# Altium PCB Camera_LED_V1.2_20200630A.PcbDoc
Units mm, origin at the board's own origin, x right, y up, seen from the top; angles counter-clockwise.
Board outline 32.5 x 60.6 mm, 2 copper layers (Top Layer, Bottom Layer); 5 components, 27 nets, 102 pads, 173 vias.
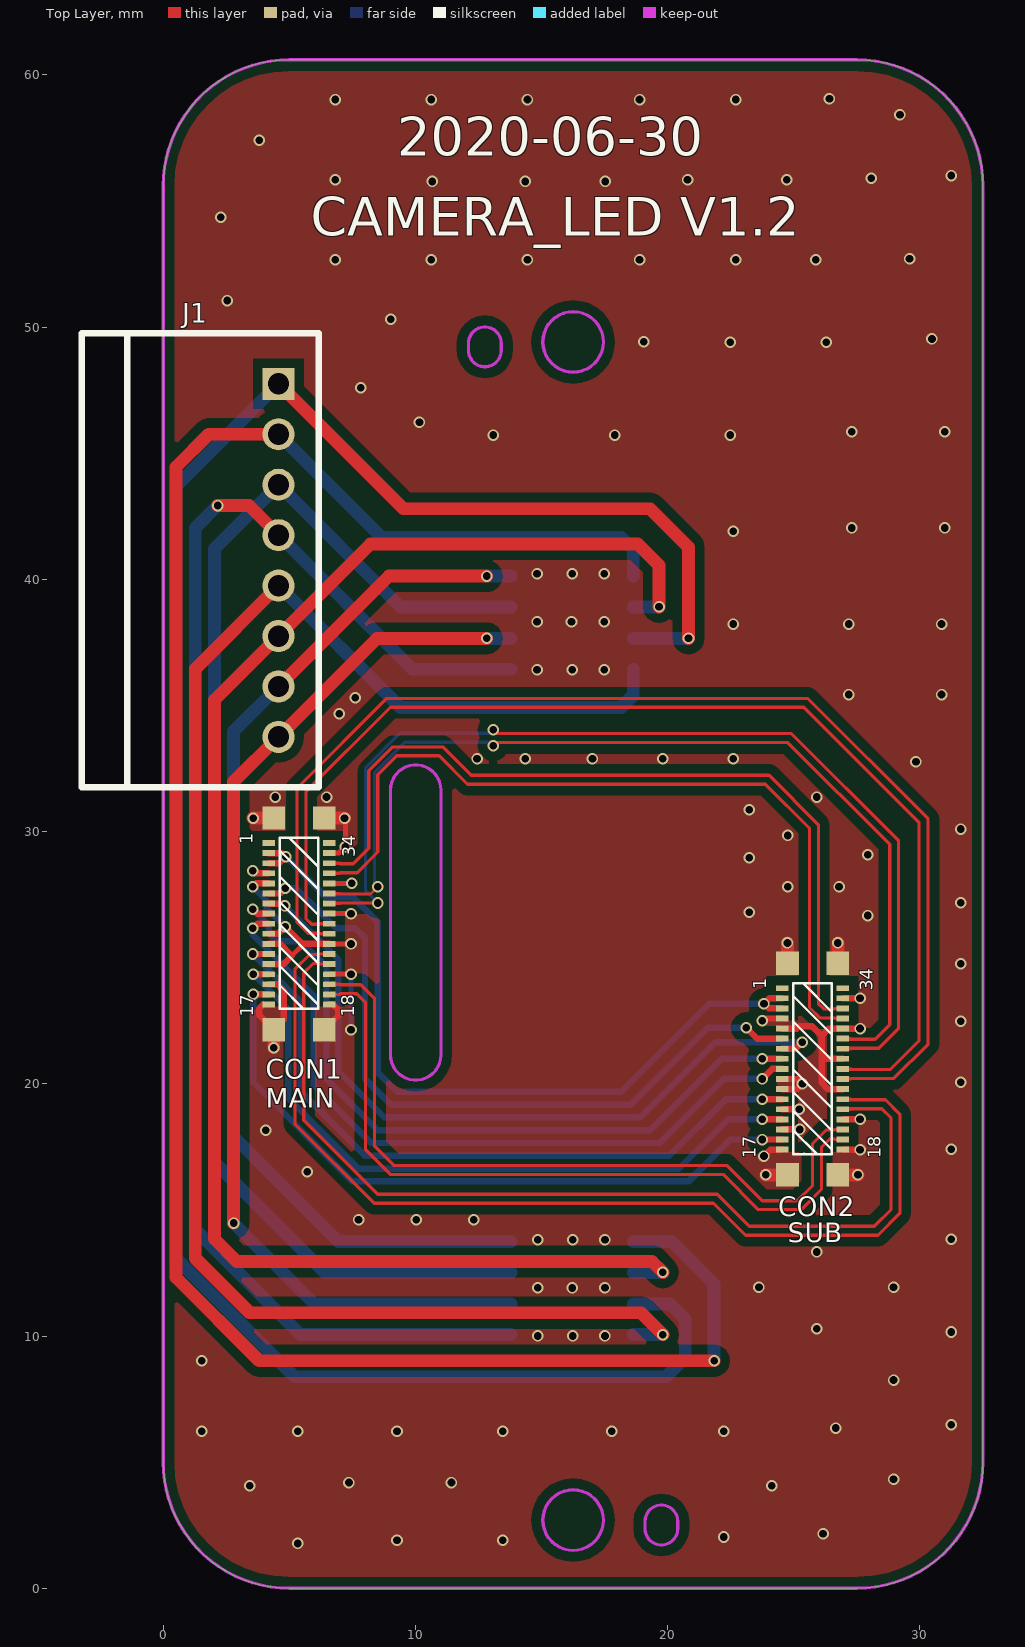
[diagram p0: Top Layer view]
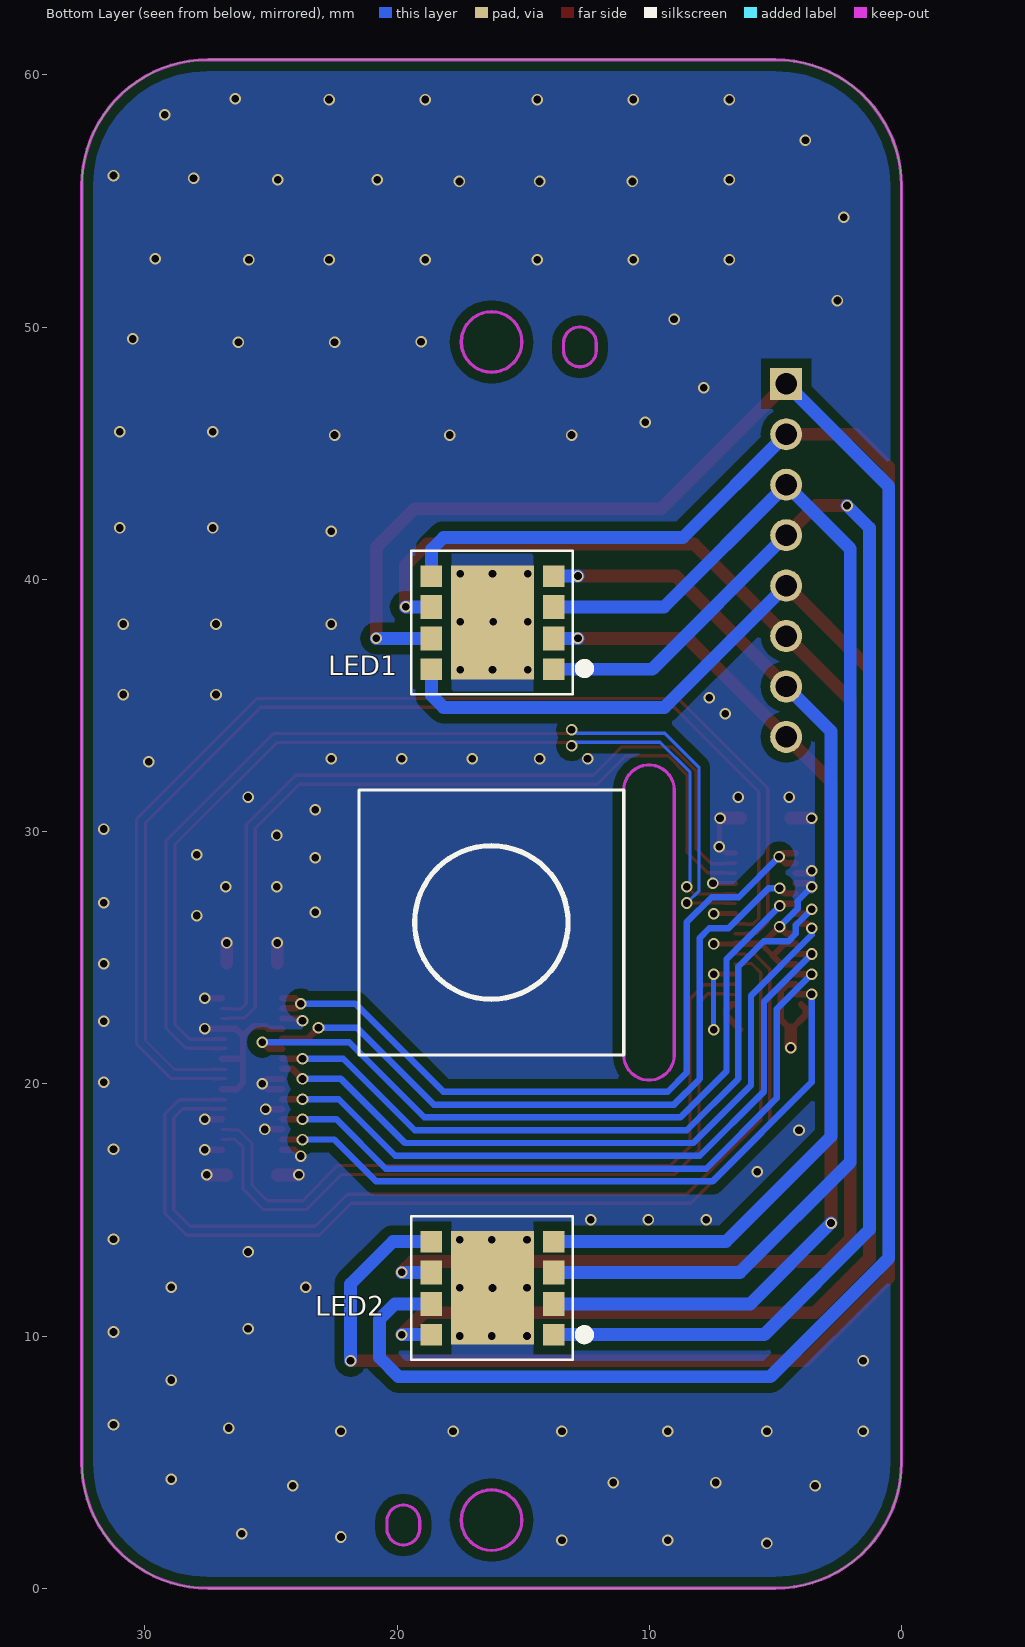
[diagram p1: Bottom Layer view, seen from below]

## Layer stack, top to bottom
Top Layer: signal copper 0.0356
Dielectric: dielectric 0.32, FR-4, Dk 4.8
Bottom Layer: signal copper 0.0356

## Board outline
0.001,5 0.001,55.6 cw(c5.001,55.6) 5.001,60.6 27.501,60.6 cw(c27.501,55.6) 32.501,55.6 32.501,5 cw(c27.501,5) 27.501,0 5.001,0 cw(c5.001,5)

## Design rules (kind name [scope] priority, off if disabled: settings)
Clearance [All] p1: gap=0.127
ComponentClearance [All] p1: gap=0 collisioncheckmode=3 verticalgap=0 showdistances=FALSE
DiffPairsRouting DIFF100 [(InNetClass('DIFF'))] p1: maxlimit=0.229 minlimit=0.229 mostfreqgap=0.229 maxuncoupledlength=12.7
DiffPairsRouting [All] p2: maxlimit=0.229 minlimit=0.229 mostfreqgap=0.229 maxuncoupledlength=12.7
HoleSize [All] p1: absolutevalues=TRUE maxlimit=12.7 minlimit=0.025 maxpercent=80.000 minpercent=20.000
HoleToHoleClearance [All] p1: gap=0 allowstackedmicrovias=TRUE
MinimumSolderMaskSliver [All] p1: minsoldermaskwidth=0
PlaneConnect [All] p1: planeconnectstyle=Direct reliefexpansion=0.508 reliefentries=4 reliefconductorwidth=0.254 reliefairgap=0.254
PolygonConnect [All] p1: connectstyle=Direct reliefconductorwidth=0.254 reliefentries=4 polygonreliefangle="90 Angle"
RoutingVias [All] p1: holewidth=0.305 width=0.457 viastyle="Through Hole" minholewidth=0.254 minwidth=0.406 maxholewidth=0.711 maxwidth=1.27
SilkToSilkClearance [All] p1: silktosilkclearance=0
SilkscreenOverComponentPads [All] p1: minsilkscreentomaskgap=0
SolderMaskExpansion [All] p1: expansion=0.102
Width DIFF-100 [(InNetClass('DIFF'))] p1: maxlimit=0.127 minlimit=0.127 preferedwidth=0.127 minimp=50.000000 maximp=50.000000 favimp=50.000000
Width [All] p2: maxlimit=2.54 minlimit=0.127 preferedwidth=0.127 minimp=50.000000 maximp=50.000000 favimp=50.000000
20 further rules are at their usual default settings.

## Classes and differential pairs
differential pair class DIFF100: RC RD0 RD1 RD2 RD3
net class DIFF: RCN RCP RDN0 RDN1 RDN2 RDN3 RDP0 RDP1 RDP2 RDP3
differential pair RD0: +RDP0 -RDN0
differential pair RD1: +RDP1 -RDN1
differential pair RD2: +RDP2 -RDN2
differential pair RD3: +RDP3 -RDN3
differential pair RC: +RCP -RCN

## Components (designator, comment, footprint, x,y, rotation, side; value= is the part's Value field where it differs from the comment)
CON1 "34PIN BTB" BTB-34P 4.188,23.146 r90 top
CON2 "34PIN BTB" BTB-34P 24.549,17.39 r90 top
J1 "8*2.0,90" XH-8A-2.0-90 4.572,47.752 r270 top
LED1 "LED-4C-8" SMD-8 18.639,36.439 r90 bottom locked
LED2 "LED-4C-8" SMD-8 18.639,10.055 r90 bottom locked

## Footprints (in the part's own frame and the unit in brackets; to place one, negate y for a bottom-side part, rotate by r counter-clockwise, add the part's x,y. Pads: shape width x height; smd on the part's side, far side on the other; paste and mask are expansions set on the pad)
BTB-34P [mm]
  rect 0.23x0.5 smd: 1(6.4,0) 2(6,0) 3(5.6,0) 4(5.2,0) 5(4.8,0) 6(4.4,0) 7(4,0) 8(3.6,0) 9(3.2,0) 10(2.8,0) 11(2.4,0) 12(2,0) 13(1.6,0) 14(1.2,0) 15(0.8,0) 16(0.4,0) 17(0,0) 18(0,-2.4) 19(0.4,-2.4) 20(0.8,-2.4) 21(1.2,-2.4) 22(1.6,-2.4) 23(2,-2.4) 24(2.4,-2.4) 25(2.8,-2.4) 26(3.2,-2.4) 27(3.6,-2.4) 28(4,-2.4) 29(4.4,-2.4) 30(4.8,-2.4) 31(5.2,-2.4) 32(5.6,-2.4) 33(6,-2.4) 34(6.4,-2.4)
  rect 0.92x0.9 smd: G1(7.387,-0.2) G2(-1,-0.2) G3(-1,-2.2) G4(7.387,-2.2)
  silkscreen extent -0.18,-1.96 6.6,-0.43
SMD-8 [mm]
  rect 4.5x3.3 smd: 9(1.85,-2.425)
  rect 0.85x0.85 smd: P1(0,-4.85) P4(3.69,-4.85) P5(3.69,0) P8(0,0)
  rect 0.95x0.85 smd: P2(1.22,-4.85) P3(2.47,-4.85) P6(2.47,0) P7(1.22,0)
  silkscreen extent -1,-5.6 4.7,0.8
XH-8A-2.0-90 [mm]
  rect 1.27x1.27 hole 0.85: 1(0,0)
  round 1.27 hole 0.85: 2(2,0) 3(4,0) 4(6,0) 5(8,0) 6(10,0) 7(12,0) 8(14,0)
  silkscreen extent -2,-7.8 16,1.6

## Via types
v1: diameter 0.457, hole 0.305, Top Layer to Bottom Layer, tented both sides, 173 vias

## Nets (pads, with @x,y where several pads share a name; then routed paths per layer and width w, separated by ;. In a path a pad name is that pad's centre, name@x,y a point inside that pad or via, vN(x,y) a via of type N, cw(c..) or ccw(c..) an arc to the next point about the centre after c; other vN are vias at no path point)
CAM_PDN0: CON1.9 CON2.9 | length 28.7
  Top Layer w0.254: v1(3.556,26.162) 3.74,26.346 CON1.9 ; v1(23.749,20.193) 24.146,20.59 CON2.9
  Bottom Layer w0.254: v1(3.556,26.162) 3.556,25.908 5.969,23.495 5.969,19.939 8.255,17.653 19.685,17.653 22.225,20.193 v1(23.749,20.193)
CMMCLK0: CON1.16 CON2.16 | length 27.4
  Top Layer w0.254: v1(3.566,23.546) CON1.16 ; v1(23.749,17.79) CON2.16
  Bottom Layer w0.254: v1(3.566,23.546) 3.566,20.056 7.493,16.129 20.828,16.129 22.489,17.79 v1(23.749,17.79)
GND: CON1.4 CON1.5 CON1.10 CON1.11 CON1.13 CON1.15 CON1.17 CON1.18 CON1.21 CON1.24 CON1.27 CON1.30 CON1.33 CON1.G1 CON1.G2 CON1.G3 CON1.G4 CON2.4 CON2.5 CON2.10 CON2.11 CON2.13 CON2.15 CON2.17 CON2.18 CON2.21 CON2.24 CON2.27 CON2.30 CON2.33 CON2.G1 CON2.G2 CON2.G3 CON2.G4 LED1.9 LED2.9 | length 41.3
  Top Layer w0.203: 5.102,25.078 5.57,25.546 ; CON1.21 v1(7.447,24.346) ; CON1.24 v1(7.447,25.546) ; CON1.27 v1(7.447,26.746) ; CON1.30 v1(7.477,27.946) ; CON1.33 6.969,29.146 v1(7.223,29.4) 7.223,30.503 v1(7.193,30.533)
  Top Layer w0.254: v1(3.556,27.813) 3.689,27.946 CON1.5 ; v1(3.556,28.448) 3.658,28.346 CON1.4 ; CON1.17@3.971,23.146 3.807,22.982 3.807,22.727 CON1.G2 4.78,22.538 4.78,23.689 4.523,23.946 CON1.15 ; CON1.13 4.77,24.746 5.102,25.078 4.634,25.546 CON1.11 ; CON1.10 4.558,25.946 v1(4.836,26.224) 5.514,25.546 5.57,25.546 CON1.24 ; CON1.G3 6.939,22.697 6.939,22.935 6.728,23.146 CON1.18 ; v1(23.749,22.5) 23.839,22.59 CON2.4 ; v1(23.82,17.136) 24.074,17.39 CON2.17 ; CON2.15 v1(25.244,18.19) ; CON2.13 v1(25.213,18.99) ; CON2.11 25.137,19.79 v1(25.344,19.997) 25.151,20.19 CON2.10 ; CON2.5 25.124,22.19 25.217,22.283 25.725,22.283 26.106,21.902 ; CON2.18 v1(27.63,17.39) ; CON2.21 v1(27.63,18.59) ; CON2.24 26.36,19.79 26.106,20.044 26.106,20.99 ; CON2.27 26.106,20.99 ; CON2.33 v1(27.63,23.39) ; v1(27.63,22.19) CON2.30 26.394,22.19 26.106,21.902 ; 26.106,20.99 26.106,21.902
  Top Layer w0.508: v1(3.566,30.533) CON1.G1 ; v1(4.388,21.435) CON1.G2 ; CON1.G4 v1(7.193,30.533) ; v1(23.89,16.39) CON2.G2 ; CON2.G1 v1(24.749,25.585) ; CON2.G3 v1(27.545,16.39) ; CON2.G4 v1(26.749,25.585)
  Bottom Layer w0.203: v1(7.447,22.146) v1(7.447,24.346)
  Bottom Layer w0.254: v1(3.556,27.813) 4.112,27.257 4.112,26.948 v1(4.836,26.224)
  other v1: 5.334,1.778 9.271,1.905 13.462,1.905 22.225,2.032 26.162,2.159 3.429,4.064 24.13,4.064 7.366,4.191 11.43,4.191 28.956,4.318 1.524,6.223 5.334,6.223 9.271,6.223 13.462,6.223 17.78,6.223 22.225,6.223 26.67,6.35 31.242,6.477 28.956,8.255 1.524,9.017 14.847,10.005 16.244,10.005 17.514,10.005 31.242,10.16 25.908,10.287 16.214,11.905 14.847,11.91 17.514,11.91 23.622,11.938 28.956,11.938 25.908,13.335 14.847,13.815 16.244,13.815 17.514,13.815 31.242,13.843 7.747,14.605 10.033,14.605 12.319,14.605 5.715,16.51 31.242,17.399 4.064,18.161 31.623,20.066 31.623,22.479 31.623,24.765 27.94,26.67 23.241,26.797 31.623,27.178 24.765,27.813 26.797,27.813 23.241,28.956 27.94,29.083 24.765,29.845 31.623,30.099 23.241,30.861 4.445,31.369 6.477,31.369 25.908,31.369 29.845,32.766 12.446,32.893 14.351,32.893 17.018,32.893 19.812,32.893 22.606,32.893 6.985,34.671 7.62,35.306 27.178,35.433 30.861,35.433 14.822,36.414 16.219,36.414 17.489,36.414 22.606,38.227 27.178,38.227 30.861,38.227 14.822,38.319 16.189,38.314 17.489,38.319 14.822,40.224 16.219,40.224 17.489,40.224 22.606,41.91 27.305,42.037 30.988,42.037 13.081,45.72 17.907,45.72 22.479,45.72 27.305,45.847 30.988,45.847 10.16,46.228 7.837,47.59 22.479,49.403 26.289,49.403 19.05,49.424 30.48,49.53 9.017,50.313 2.54,51.054 6.821,52.67 10.631,52.67 14.441,52.67 18.886,52.67 22.696,52.67 25.871,52.67 29.591,52.705 2.286,54.356 10.668,55.774 14.351,55.774 17.526,55.774 6.821,55.845 20.791,55.845 24.728,55.845 28.067,55.901 31.242,56.007 3.81,57.404 29.21,58.42 6.821,59.02 10.631,59.02 14.441,59.02 18.886,59.02 22.696,59.02 26.416,59.055
LED1+: J1.8 LED1.P2 LED2.P2 | length 43.2
  Top Layer w0.508: v1(2.794,14.478) 2.794,31.974 J1.8 8.479,37.659 v1(12.827,37.659)
  Bottom Layer w0.508: v1(2.794,14.478) 5.997,11.275 LED2.P2 ; v1(12.827,37.659) LED1.P2
LED1-: J1.4 LED1.P1 LED2.P1 | length 57.6
  Top Layer w0.508: v1(2.159,42.926) 3.398,42.926 J1.4
  Bottom Layer w0.508: v1(2.159,42.926) 1.27,42.037 1.27,14.224 5.439,10.055 LED2.P1 ; J1.4 9.885,36.439 LED1.P1
LED2+: J1.7 LED1.P4 LED2.P4 | length 42.3
  Top Layer w0.508: J1.7 8.949,40.129 v1(12.827,40.129)
  Bottom Layer w0.508: J1.7 2.794,33.974 2.794,17.907 6.956,13.745 LED2.P4 ; v1(12.827,40.129) LED1.P4
LED2-: J1.3 LED1.P3 LED2.P3 | length 52.7
  Bottom Layer w0.508: LED2.P3 6.398,12.525 2.032,16.891 2.032,41.212 J1.3 9.415,38.909 LED1.P3
LED3+: J1.6 LED1.P6 LED2.P6 | length 64.1
  Top Layer w0.508: v1(19.659,38.909) 19.659,40.557 18.814,41.402 8.222,41.402 J1.6 2.032,35.212 2.032,13.843 2.921,12.954 19.383,12.954 v1(19.812,12.525)
  Bottom Layer w0.508: LED2.P6 v1(19.812,12.525) ; LED1.P6 v1(19.659,38.909)
LED3-: J1.2 LED1.P5 LED2.P5 | length 83.4
  Top Layer w0.508: J1.2 1.81,45.752 0.508,44.45 0.508,12.319 3.81,9.017 v1(21.844,9.017)
  Bottom Layer w0.508: J1.2 8.668,41.656 18.161,41.656 18.639,41.178 LED1.P5 ; LED2.P5 20.164,13.745 21.844,12.065 v1(21.844,9.017)
LED4+: J1.5 LED1.P8 LED2.P8 | length 66.3
  Top Layer w0.508: J1.5 1.27,36.45 1.27,13.081 3.429,10.922 18.945,10.922 v1(19.812,10.055)
  Bottom Layer w0.508: J1.5 9.399,34.925 18.161,34.925 18.639,35.403 LED1.P8 ; LED2.P8 v1(19.812,10.055)
LED4-: J1.1 LED1.P7 LED2.P7 | length 87.4
  Top Layer w0.508: J1.1 9.525,42.799 19.304,42.799 20.828,41.275 v1(20.828,37.659)
  Bottom Layer w0.508: J1.1 0.508,43.688 0.508,13.081 5.207,8.382 19.939,8.382 20.701,9.144 20.701,10.668 20.094,11.275 LED2.P7 ; LED1.P7 v1(20.828,37.659)
RCN: CON1.29 CON2.29 | length 39.3
  Top Layer w0.127: CON1.29 6.997,27.546 7.02,27.524 ; CON1.29@6.766,27.524 8.22,27.524 v1(8.509,27.813) ; v1(13.081,33.401) 13.208,33.528 24.765,33.528 28.804,29.489 28.804,22.348 28.224,21.768 CON2.29@26.781,21.768 ; CON2.29 27.266,21.79 27.289,21.768
  Bottom Layer w0.127: v1(8.509,27.813) 8.382,27.94 8.382,32.347 9.575,33.541 12.941,33.541 v1(13.081,33.401)
RCP: CON1.28 CON2.28 | length 41.8
  Top Layer w0.127: CON1.28 6.997,27.146 7.02,27.168 ; CON1.28@6.766,27.168 v1(8.509,27.168) ; v1(13.081,34.036) 13.233,33.884 24.912,33.884 29.159,29.637 29.159,22.2 28.371,21.412 CON2.28@26.781,21.412 ; CON2.28 27.266,21.39 27.289,21.412
  Bottom Layer w0.127: v1(8.509,27.168) 8.026,27.651 8.026,32.537 9.385,33.896 12.941,33.896 v1(13.081,34.036)
RDN0: CON1.26 CON2.26 | length 46.3
  Top Layer w0.127: CON1.26 6.197,26.346 6.175,26.324 5.892,26.324 5.661,26.555 5.661,31.574 9.012,34.925 25.4,34.925 29.972,30.353 29.972,21.717 28.823,20.568 CON2.26@26.781,20.568 ; CON2.26 27.266,20.59 27.289,20.568
RDN1: CON1.32 CON2.32 | length 32.6
  Top Layer w0.127: CON1.32 6.997,28.746 7.02,28.724 7.54,28.724 8.153,29.337 8.153,32.405 9.106,33.358 11.087,33.358 12.212,32.233 24.023,32.233 25.979,30.277 25.979,23.172 26.183,22.968 26.609,22.968 26.631,22.99 CON2.32
RDN2: CON1.23 CON2.23 | length 40.9
  Top Layer w0.127: CON1.23 6.194,25.146 6.172,25.124 5.802,25.124 5.222,24.544 5.222,18.405 8.362,15.265 21.819,15.265 23.089,13.995 28.341,13.995 29.21,14.864 29.21,18.796 28.638,19.368 CON2.23@26.785,19.368 ; CON2.23 27.271,19.39 27.293,19.368
RDN3: CON1.20 CON2.20 | length 29.5
  Top Layer w0.127: CON1.20 6.997,23.946 7.02,23.924 7.826,23.924 8.382,23.368 8.382,17.526 9.144,16.764 22.347,16.764 23.744,15.367 25.146,15.367 25.747,15.968 25.747,17.632 26.283,18.168 26.609,18.168 26.631,18.19 CON2.20
RDP0: CON1.25 CON2.25 | length 48.7
  Top Layer w0.127: CON1.25 6.197,25.946 6.175,25.968 5.745,25.968 5.305,26.408 5.305,31.721 8.865,35.281 25.547,35.281 30.328,30.5 30.328,21.57 28.97,20.212 CON2.25@26.781,20.212 ; CON2.25 27.266,20.19 27.289,20.212
RDP1: CON1.31 CON2.31 | length 32.6
  Top Layer w0.127: CON1.31 6.997,28.346 7.02,28.368 7.688,28.368 8.509,29.19 8.509,32.258 9.254,33.003 10.939,33.003 12.065,31.877 23.876,31.877 25.623,30.13 25.623,23.025 26.036,22.612 26.609,22.612 26.631,22.59 CON2.31
RDP2: CON1.22 CON2.22 | length 38.5
  Top Layer w0.127: CON1.22 6.194,24.746 6.172,24.768 5.949,24.768 5.578,24.397 5.578,18.552 8.509,15.621 21.966,15.621 23.236,14.351 28.194,14.351 28.854,15.011 28.854,18.649 28.491,19.012 CON2.22@26.785,19.012 ; CON2.22 27.271,18.99 27.293,19.012
RDP3: CON1.19 CON2.19 | length 29.5
  Top Layer w0.127: CON1.19 6.997,23.546 7.02,23.568 7.679,23.568 8.026,23.221 8.026,17.379 8.997,16.408 22.2,16.408 23.597,15.011 25.293,15.011 26.102,15.82 26.102,17.484 26.43,17.812 26.609,17.812 26.631,17.79 CON2.19
SCL2: CON1.8 CON2.8 | length 29.4
  Top Layer w0.254: v1(3.556,26.924) 3.734,26.746 CON1.8 ; v1(23.749,20.99) CON2.8
  Bottom Layer w0.254: v1@3.556,26.863 v1(3.556,26.924) 4.188,26.292 4.188,25.946 4.48,25.654 5.461,25.654 6.477,24.638 6.477,20.193 8.509,18.161 19.304,18.161 22.133,20.99 v1(23.749,20.99)
SDA2: CON1.7 CON2.7 | length 29.4
  Top Layer w0.254: CON1.7 4.731,27.146 v1(4.826,27.051) ; CON2.7 25.086,21.39 v1(25.34,21.644)
  Bottom Layer w0.254: v1(4.826,27.051) 6.939,24.938 6.939,20.493 8.763,18.669 18.923,18.669 21.898,21.644 v1(25.34,21.644)
VCAM_AF_PMU: CON1.2 CON1.3 CON2.2 CON2.3 | length 30.6
  Top Layer w0.254: CON1.3 4.603,28.746 v1(4.855,28.999) 4.708,29.146 CON1.2 ; v1(23.82,23.172) 24.038,23.39 CON2.2 ; 24.002,22.99 CON2.3
  Bottom Layer w0.254: v1(4.855,28.999) 6.457,27.397 7.528,27.397 8.509,26.416 8.509,20.447 9.271,19.685 18.161,19.685 21.648,23.172 v1(23.82,23.172)
VCAM_IO_PMU: CON1.6 CON2.6 | length 28.7
  Top Layer w0.254: CON1.6 4.634,27.546 v1(4.836,27.748) ; v1(23.114,22.225) 23.549,21.79 CON2.6
  Bottom Layer w0.254: v1(4.836,27.748) 5.272,27.748 6.858,26.162 7.62,26.162 8.001,25.781 8.001,20.193 9.017,19.177 18.542,19.177 21.59,22.225 v1(23.114,22.225)
VCAMA_PMU: CON1.12 CON2.12 | length 28
  Top Layer w0.254: v1(3.556,25.146) CON1.12 ; v1(23.749,19.39) CON2.12
  Bottom Layer w0.254: v1(3.556,25.146) 5.451,23.251 5.451,19.695 8.001,17.145 20.066,17.145 22.311,19.39 v1(23.749,19.39)
VCAMD_PMU: CON1.14 CON2.14 | length 27.7
  Top Layer w0.254: v1(3.566,24.346) CON1.14 ; v1(23.749,18.59) CON2.14
  Bottom Layer w0.254: v1(3.566,24.346) 4.953,22.959 4.953,19.431 7.747,16.637 20.447,16.637 22.4,18.59 v1(23.749,18.59)
pads on no net: CON1.1 CON1.34 CON2.1 CON2.34

## Polygon pours and split planes (outlines as drawn)
GND on Bottom Layer "Bottom Layer-No Net" (solid, remove dead copper, pour order 2): -1.016,22.479 -1.016,58.674 -1.016,58.928 1.016,60.96 1.524,61.468 11.303,61.468 29.972,61.468 32.893,58.547 34.163,57.277 34.163,44.323 34.163,1.397 31.369,-1.397 30.607,-2.159 25.273,-2.159 3.556,-2.159 0.127,1.27 -1.016,2.413 -1.016,22.098
GND on Top Layer "Bottom Layer-No Net" (solid, remove dead copper, pour order 4): -0.635,21.336 -0.635,58.547 2.032,61.214 2.286,61.468 5.08,61.468 30.48,61.468 32.258,59.69 33.909,58.039 33.909,53.34 33.909,2.921 30.48,-0.508 29.845,-1.143 26.543,-1.143 2.667,-1.143 -0.127,1.651 -0.635,2.159 -0.635,21.336

## Keep-outs
Keep-Out Layer:
  circle w0.127: c16.253,2.702 r1.2
  circle w0.127: c16.253,49.411 r1.2
  lines w0.127: 0.001,5 ccw(c5.001,5) 5.001,0 27.501,0 ccw(c27.501,5) 32.501,5 32.501,55.6 ccw(c27.501,55.6) 27.501,60.6 5.001,60.6 ccw(c5.001,55.6) 0.001,55.6 0.001,5 ; 9.011,21.144 ccw(c10.011,21.144) 11.011,21.144 11.011,31.644 ccw(c10.011,31.644) 9.011,31.644 9.011,21.144 ; 12.103,49.076 ccw(c12.753,49.076) 13.403,49.076 13.403,49.358 ccw(c12.753,49.358) 12.103,49.358 12.103,49.076 ; 19.103,2.367 ccw(c19.753,2.367) 20.403,2.367 20.403,2.649 ccw(c19.753,2.649) 19.103,2.649 19.103,2.367

## Silkscreen, mask and mechanical layers (free items; w line width, h text height)
Top Overlay:
  text "2020-06-30" at 9.271,56.79 h1.52
  text "CAMERA_LED V1.2" at 5.842,53.615 h1.52
  text "MAIN" at 4.064,19.05 h0.76
  text "SUB" at 24.765,13.716 h0.76
Bottom Overlay:
  circle w0.254: c12.573,10.055 r0.254
  circle w0.254: c12.573,10.055 r0.127
  circle w0.254: c12.573,36.464 r0.254
  circle w0.254: c12.573,36.464 r0.127
  circle w0.127: c16.261,26.394 r3
  circle w0.127: c16.261,26.394 r3.084
  lines w0.127: 11.011,21.144 11.011,31.644 21.511,31.644 21.511,21.144 11.011,21.144
Mechanical 1:
  circle w0.127: c16.253,2.702 r1.2
  circle w0.127: c16.253,49.411 r1.2
  lines w0.127: 0.001,5 ccw(c5.001,5) 5.001,0 27.501,0 ccw(c27.501,5) 32.501,5 32.501,55.6 ccw(c27.501,55.6) 27.501,60.6 5.001,60.6 ccw(c5.001,55.6) 0.001,55.6 0.001,5 ; 9.011,21.144 ccw(c10.011,21.144) 11.011,21.144 11.011,31.644 ccw(c10.011,31.644) 9.011,31.644 9.011,21.144 ; 12.103,49.076 ccw(c12.753,49.076) 13.403,49.076 13.403,49.358 ccw(c12.753,49.358) 12.103,49.358 12.103,49.076 ; 19.103,2.367 ccw(c19.753,2.367) 20.403,2.367 20.403,2.649 ccw(c19.753,2.649) 19.103,2.649 19.103,2.367
Mechanical 6:
  lines w0.127: 0.501,17.336 8.157,17.336 8.157,35.336 0.501,35.336 0.501,17.336 ; 10.999,21.151 21.499,21.151 21.499,31.651 10.999,31.651 10.999,21.151 ; 13.049,9.111 13.049,14.682 19.449,14.682 19.449,9.111 13.049,9.111 ; 13.049,35.512 13.049,41.083 19.449,41.083 19.449,35.512 13.049,35.512 ; 23.981,21.947 27.396,21.947 27.396,30.847 23.981,30.847 23.981,21.947 ; 24.696,22.397 26.681,22.397 26.681,30.397 24.696,30.397 24.696,22.397

## Dimensions
0.001,5 to 32.501,5 on Mechanical 1
3.011,60.521 to 29.511,60.521 on Mechanical 1
5.001,0 to 5.001,60.6 on Mechanical 1

## Text inside footprints (layer, text, board x,y; h text height)
CON1: Top Overlay "1" at 3.553,29.496 h0.51 r90; Top Overlay "17" at 3.566,22.668 h0.51 r90; Top Overlay "18" at 7.574,22.668 h0.51 r90; Top Overlay "34" at 7.617,28.988 h0.51 r90
CON2: Top Overlay "1" at 23.914,23.74 h0.51 r90; Top Overlay "17" at 23.495,17.039 h0.51 r90; Top Overlay "18" at 28.448,17.039 h0.51 r90; Top Overlay "34" at 28.138,23.68 h0.51 r90